# Altium PCB Copy of LoRaStm32.PcbDoc
Units mm, origin at the board's own origin, x right, y up, seen from the top; angles counter-clockwise.
Board outline 80.75 x 33.13 mm, 2 copper layers (Top Layer, Bottom Layer); 29 components, 27 nets, 136 pads, 94 vias.
Unrouted connection lines stored in the file: 30.
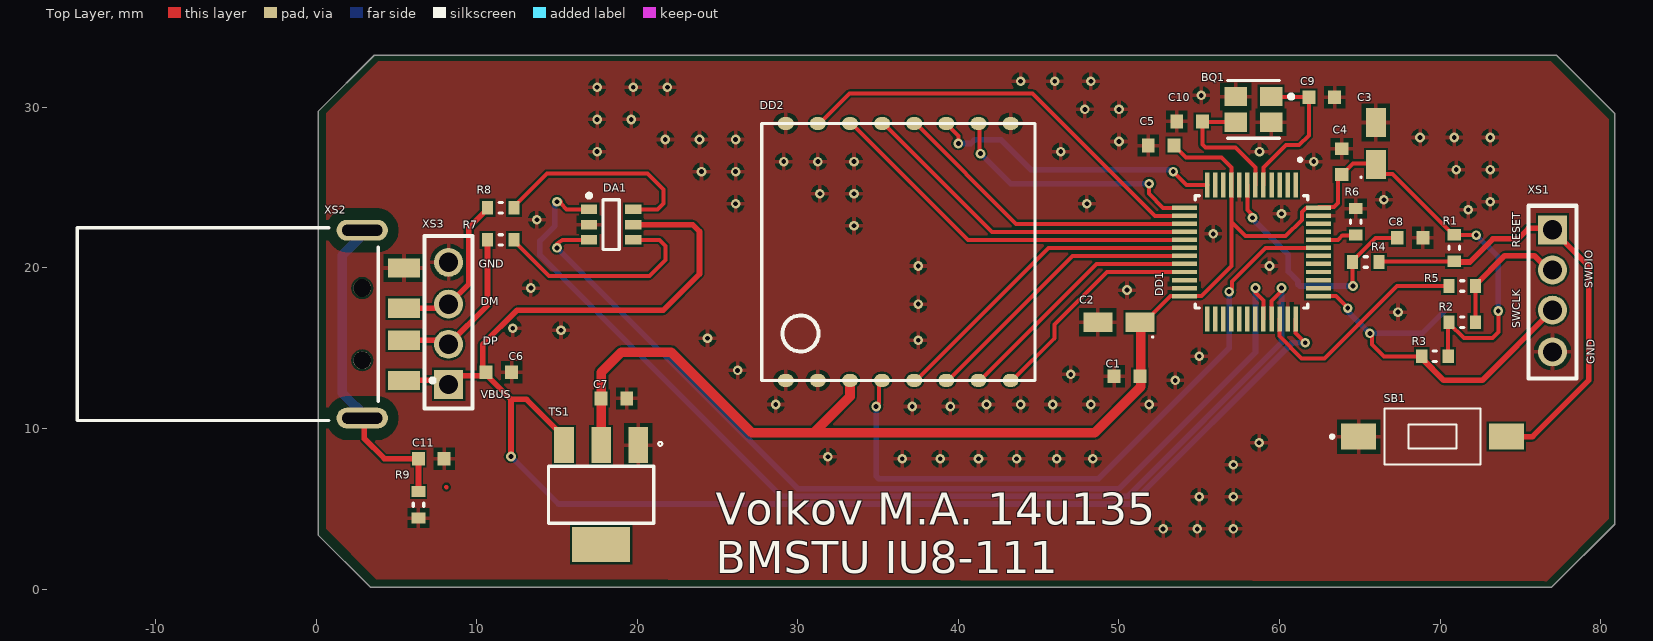
[diagram p0: Top Layer view]
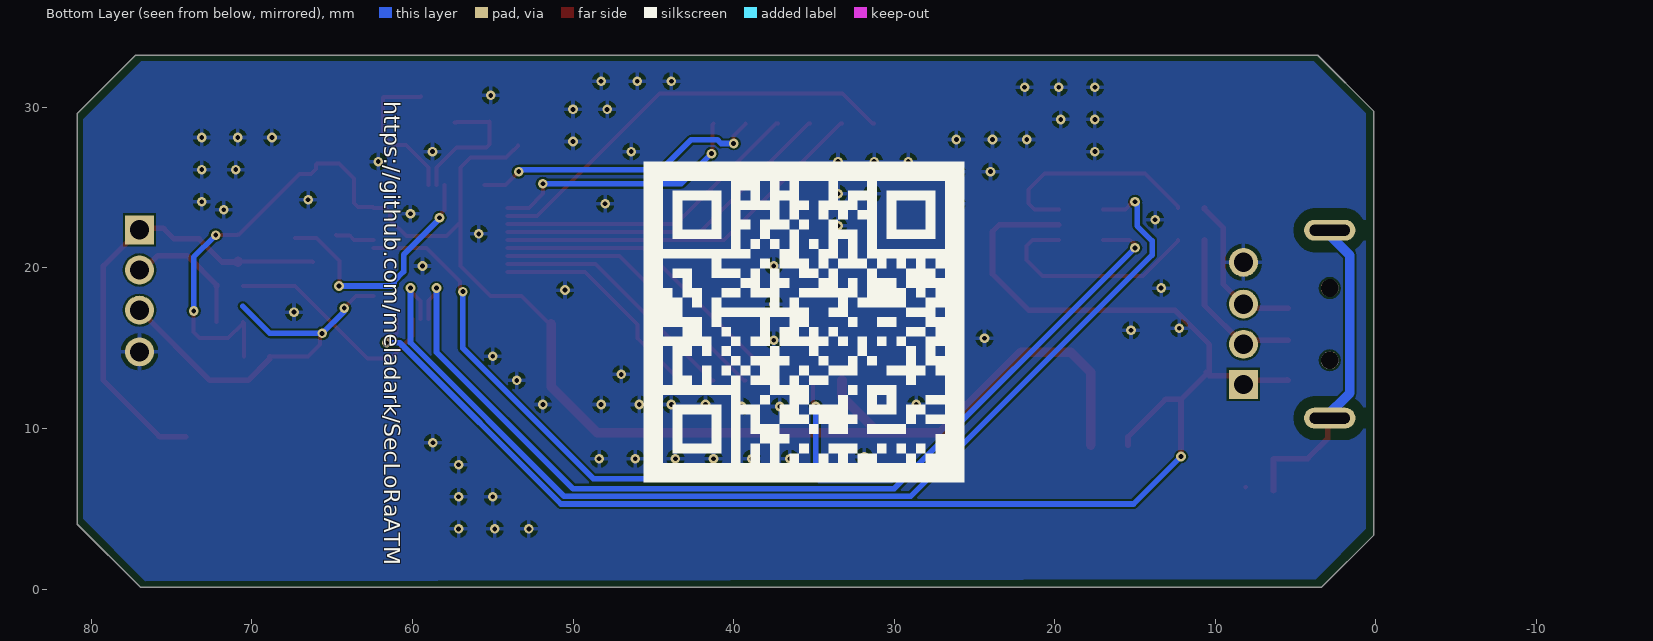
[diagram p1: Bottom Layer view, seen from below]

## Layer stack, top to bottom
Top Solder: solder mask 0.0102, Solder Resist, Dk 3.5
Top Layer: signal copper 0.0356
Dielectric 1: dielectric 0.32, FR-4, Dk 4.8
Bottom Layer: signal copper 0.0356
Bottom Solder: solder mask 0.0102, Solder Resist, Dk 3.5

## Board outline
3.375,0.125 0.125,3.375 0.125,29.75 3.625,33.25 77.25,33.25 80.876,29.624 80.875,4.044 76.956,0.125

## Design rules (kind name [scope] priority, off if disabled: settings)
Clearance [All] p1: gap=0.125 ignorepadtopadclearanceinfootprint=FALSE
PolygonConnect [All] p1: connectstyle=Relief reliefconductorwidth=0.254 reliefentries=4 polygonreliefangle="90 Angle" airgapwidth=0.254
RoutingCorners [All] p1: cornerstyle=45-Degree minsetback=3 maxsetback=3
RoutingVias [All] p1: holewidth=0.3 width=0.7 viastyle="Through Hole" minholewidth=0.3 minwidth=0.6 maxholewidth=0.6 maxwidth=1.2
SolderMaskExpansion [All] p1: expansion=0.102
Width [All] p1: maxlimit=10 minlimit=0.125 preferedwidth=0.6
29 further rules are at their usual default settings.

## Components (designator, comment, footprint, x,y, rotation, side; value= is the part's Value field where it differs from the comment)
BQ1 "NX3225GA" NDK_NX3225GA_0 58.375,29.875 r180 top
C1 "*" CAPC1608X09L 50.5,13.25 r180 top
C2 "*" CAPMP3216X16N-A 50,16.625 r180 top
C3 "*" CAPMP3216X16N-A 66,27.75 r90 top
C4 "GRM188R72A104KA35D" CAPC1608X09L 63.875,26.625 r90 top
C5 "*" CAPC1608X09L 52.625,27.625 r180 top
C6 "*" CAPC1608X09L 11.375,13.5 r0 top
C7 "*" CAPC1608X09L 18.55,11.875 r180 top
C8 "*" CAPC1608X09L 68.125,21.875 r180 top
C9 "*" CAPC1608X09L 62.625,30.625 r180 top
C10 "*" CAPC1608X09L 54.395,29.125 r0 top
C11 "*" CAPC1608X09L 7.175,8.125 r180 top value=4.7n
DA1 "USBLC6-2SC6" SOT95P280X145-6N 18.375,22.7 r0 top
DD1 "STM32L073CZT6" *QFP50P900X900X160-48N 58.25,21 r270 top
DD2 "RA-02 SX1278" RA-02 27.75,13 r90 top
R1 "R1608" RESC1608X05N 70.875,21.25 r270 top value=10k
R2 "R1608" RESC1608X05N 71.375,16.625 r0 top value=10k
R3 "R1608" RESC1608X05N 69.675,14.5 r180 top value=10k
R4 "R1608" RESC1608X05N 65.375,20.375 r0 top value=22
R5 "R1608" RESC1608X05N 71.375,18.875 r0 top value=22
R6 "R1608" RESC1608X05N 64.75,22.875 r270 top value=22
R7 "R1608" RESC1608X05N 11.5,21.75 r180 top value=22
R8 "R1608" RESC1608X05N 11.5,23.75 r180 top value=22
R9 "R1608" RESC1608X05N 6.375,5.25 r90 top value=22
SB1 "1437566-3 (FSMSM)" *SW_1437566-4 69.525,9.5 r0 top
TS1 "LD1117S33CTR" *SOT223 17.75,5.875 r270 top
XS1 "PBS-4" PBS-4 77,22.375 r270 top
XS2 "Conn_Molex_0480372200_eec" Molex_0480372200_0 -5.5,16.5 r270 top
XS3 "PBS-4" PBS-4 8.25,12.75 r90 top

## Footprints (in the part's own frame and the unit in brackets; to place one, negate y for a bottom-side part, rotate by r counter-clockwise, add the part's x,y. Pads: shape width x height; smd on the part's side, far side on the other; paste and mask are expansions set on the pad)
*QFP50P900X900X160-48N [mm]
  rect 1.56x0.28 smd: 1(-4.18,2.75) 2(-4.18,2.25) 3(-4.18,1.75) 4(-4.18,1.25) 5(-4.18,0.75) 6(-4.18,0.25) 7(-4.18,-0.25) 8(-4.18,-0.75) 9(-4.18,-1.25) 10(-4.18,-1.75) 11(-4.18,-2.25) 12(-4.18,-2.75) 25(4.18,-2.75) 26(4.18,-2.25) 27(4.18,-1.75) 28(4.18,-1.25) 29(4.18,-0.75) 30(4.18,-0.25) 31(4.18,0.25) 32(4.18,0.75) 33(4.18,1.25) 34(4.18,1.75) 35(4.18,2.25) 36(4.18,2.75)
  rect 0.28x1.56 smd: 13(-2.75,-4.18) 14(-2.25,-4.18) 15(-1.75,-4.18) 16(-1.25,-4.18) 17(-0.75,-4.18) 18(-0.25,-4.18) 19(0.25,-4.18) 20(0.75,-4.18) 21(1.25,-4.18) 22(1.75,-4.18) 23(2.25,-4.18) 24(2.75,-4.18) 37(2.75,4.18) 38(2.25,4.18) 39(1.75,4.18) 40(1.25,4.18) 41(0.75,4.18) 42(0.25,4.18) 43(-0.25,4.18) 44(-0.75,4.18) 45(-1.25,4.18) 46(-1.75,4.18) 47(-2.25,4.18) 48(-2.75,4.18)
  silkscreen extent -5.84,-3.5 3.5,3.5, body extent -4.5,-4.5 4.5,4.5, height 1.6
*SOT223 [mil]
  rect 88x48 smd: 1(-122,91) 2(-122,0) 3(-122,-91)
  rect 86.61x141.73 smd: 4(122.01,0)
  silkscreen extent -130,-129 70,150, body extent -138,-128 138,128, height 67
*SW_1437566-4 [mm]
  rect 2.18x1.6 smd: 1(-4.6,0) 2(4.6,0)
  silkscreen extent -6.35,-1.75 3,1.75, body extent -4.98,-1.75 4.98,1.75, height 4.4
CAPC1608X09L [mm] "Chip Capacitor, 2-Leads, Body 1.60x0.80mm, IPC High Density"
  rect 0.8x0.85 smd paste-0.05 mask+0.07: 1(-0.8,0) 2(0.8,0)
  body extent -0.8,-0.4 0.8,0.4, height 0.9
CAPMP3216X16N-A [mm] "Molded Capacitor, 2-Leads, Body 3.20x1.60mm, IPC Medium Density"
  rect 1.8x1.23 smd: 1(-1.31,0) 2(1.31,0)
  silkscreen extent -2.15,0.88 -2.05,0.97, body extent -1.92,-0.9 1.92,0.9, height 1.6
Molex_0480372200_0 [mm]
  rect 1.2x2 smd paste+0 mask+0: 1(3.5,10.975) 2(1,10.975) 3(-1,10.975) 4(-3.5,10.975)
  oval 1.3x3.2 hole 2.5 slot 0.7 at 0 deg paste-1000 mask+0: 5(-5.85,8.375) 6(5.85,8.375)
  round 1.1 hole 1.1 unplated paste-1000 mask+0: ""(-2.25,8.375) ""(2.25,8.375)
  silkscreen extent -6,-9.38 6,12.88, body extent -6.02,-9.32 6.03,11.63, height 2.11
NDK_NX3225GA_0 [mm]
  rect 1.4x1.2 smd paste+0 mask+0: 1(-1.1,-0.8) 2(1.1,-0.8) 3(1.1,0.8) 4(-1.1,0.8)
  silkscreen extent -2.48,-1.8 1.6,1.8, body extent -1.6,-1.25 1.6,1.25, height 0.6
PBS-4 [mm]
  rect 1.8x1.8 hole 1.2: 1(0,0)
  round 1.8 hole 1.2: 2(2.5,0) 3(5,0) 4(7.6,0)
  silkscreen extent -1.5,-1.5 9.25,1.5, body extent -1.25,-1.27 8.91,1.27, height 8.6
RA-02 [mm]
  oval 0.8x1 smd: 1(0,-1.5) 2(0,-3.5) 3(0,-5.5) 4(0,-7.493) 5(0,-9.5) 6(0,-11.5) 7(0,-13.5) 8(0,-15.5) 9(16,-15.5) 10(16,-13.5) 11(16,-11.5) 12(16,-9.5) 13(16,-7.5) 14(16,-5.5) 15(16,-3.5) 16(16,-1.5)
  silkscreen extent 0,-17.02 16,0, body extent 0,-17.01 16,-0.01, height 3.2
RESC1608X05N [mm] "Chip Resistor, 2-Leads, Body 1.60x0.80mm, IPC Medium Density"
  rect 0.7x0.85 smd paste-0.05: 1(-0.825,0) 2(0.825,0)
  silkscreen extent -0.1,-0.33 0.1,0.33, body extent -0.8,-0.4 0.8,0.4, height 0.45
SOT95P280X145-6N [mm] "SOT23, 6-Leads, Body 2.92x2.80mm, Pitch 0.95mm, IPC Medium Density"
  rect 1x0.6 smd: 1(-1.375,0.95) 2(-1.375,0) 3(-1.375,-0.95) 4(1.375,-0.95) 5(1.375,0) 6(1.375,0.95)
  silkscreen extent -1.5,-1.55 0.5,1.92, body extent -1.6,-1.53 1.6,1.53, height 1.45

## Part data
BQ1: library part NX3225GA-25MHZ, "NX3225GA-25MHZ 8pF, 25 МГц, 30/20ppm, 8пФ, -40...+85°C, SMD 3.2*2.5*0.75мм, Кварцевый резонатор", Package="SMD-4 NDK America, Inc.", Availability=Unavailable, ComponentLink1Description=buy, ComponentLink1URL=https://www.chipdip.ru/product0/9000523947, ComponentLink2Description=datasheet, ComponentLink2URL=https://static.chipdip.ru/lib/014/DOC004014815.pdf, MF="NDK America, Inc.", MP="NX3225GA-25MHZ 8pF", Price=None, SnapEDA_Link=https://www.snapeda.com/parts/NX2520SA-24.000000MHZ-B8/NDK%20America%2C%20Inc./view-part/?ref=snap
C1 C4 C5 C6 C7 C8 C9 C10 C11: library part CC1608, "Конденсатор 1.6x0.8 мм", Tolerance=±10%, ТКЕ=X7R
  C1 C4 C5 C8: GRM188R71H104K=100nF, РКД Наименование="CC1608M - NP0 - 16 V - 10 nF ±10%"
  C6: GRM188R71H104K=100n, РКД Наименование="CC1608M - NP0 - 16 V - 10 nF ±10%"
  C7: GRM188R61E106M=10u, РКД Наименование="CC1608M - NP0 - 16 V - 10 nF ±10%"
  C9: GRM1885C1H240J=24pF, РКД Наименование="CC1608M - NP0 - 16 V - 10 nF ±10%"
  C10: GRM1887U1H472JA01D=24pF, РКД Наименование="CC1608M - NP0 - 16 V - 10 nF ±10%"
  C11: РКД Наименование="CC1608M - NP0 - 16 V - 4.7 nF ±10%"
C2 C3: library part CT3216-A, "Tantalum Surface Mount Capacitor, Size A", Voltage=6.3V
  C2: TECAP1/16VA10=1uF
  C3: TECAP10/10VA10=10uF
DA1: "USB protection IC", Breakdown Voltage=6V, Capacitance=3.5pF, Case/Package=SOT-23, Clamping Voltage=17V, Leakage Current=150nA, Manufacturer=STMicroelectronics, Max Operating Temperature=125°C, Min Operating Temperature=-40°C, Operating Supply Voltage=1.1V, Package Quantity=3000, Peak Pulse Current=5A, Power Line Protection=Yes, Reverse Standoff Voltage=5.25V, Supplier Part Number 1=497-5235-1-ND, Test Current=1mA, Working Voltage=5V, ComponentLink1Description=http://www.farnell.com/datasheets/1690354.pdf, ComponentLink1URL=http://www.farnell.com/datasheets/1690354.pdf, ComponentLink2Description=http://www.st.com/content/ccc/resource/technical/document/datasheet/06/1d/48/9c/6c/20/4a/b2/CD00050750.pdf/files/CD00050750.pdf/jcr:content/translations/en.CD00050750.pdf, ComponentLink2URL=http://www.st.com/content/ccc/resource/technical/document/datasheet/06/1d/48/9c/6c/20/4a/b2/CD00050750.pdf/files/CD00050750.pdf/jcr:content/translations/en.CD00050750.pdf, ComponentLink3Description=http://www.st.com/web/en/resource/technical/document/datasheet/CD00050750.pdf, ComponentLink3URL=http://www.st.com/web/en/resource/technical/document/datasheet/CD00050750.pdf, ComponentLink4Description=http://datasheet.iiic.cc/stmicroelectronics/USBLC6-2SC6.pdf, ComponentLink4URL=http://datasheet.iiic.cc/stmicroelectronics/USBLC6-2SC6.pdf, ComponentLink5Description=http://www.produktinfo.conrad.com/datenblaetter/1100000-1199999/001184109-da-01-en-IC_ESD_PROTECTI_USBLC6_2SC6_SOT_23_6_STM.pdf, ComponentLink5URL=http://www.produktinfo.conrad.com/datenblaetter/1100000-1199999/001184109-da-01-en-IC_ESD_PROTECTI_USBLC6_2SC6_SOT_23_6_STM.pdf, Contact Plating=Matte,Tin, Data Rate=480Mbps, Depth=1.75mm, Direction=Bidirectional,Unidirectional, Element Configuration=Dual, ESD Protection=Yes, Height=1.3mm, Lead Free="Lead Free", Length=3.05mm, Manufacturer Part Number=USBLC6-2SC6, Max Breakdown Voltage=6V, Max Reverse Leakage Current=150nA, Min Breakdown Voltage=6V, Mount="Surface Mount", Number of Bidirectional Channels=2, Number of Channels=2, Number of Elements=1, Number of Pins=6, Packaging="Tape and Reel", PartNo=USBLC6-2SC6, Polarity=Bidirectional,Unidirectional, Pricing 1="1=0.49, 10=0.419, 100=0.3131, 500=0.24602, 1000=0.1901 (USD)", Radiation Hardening=No, REACH SVHC="No SVHC", Reverse Breakdown Voltage=6V, Stock 1=165611, Supplier 1=Digi-Key, Termination=SMD/SMT, Width=1.75mm
DD1: "ARM® Cortex®-M0+ STM32 L0 Microcontroller IC 32-Bit 32MHz 192KB _192K x 8_ FLASH 48-LQFP", Package="LQFP-48 STMicroelectronics", Digi-Key_Part_Number=497-17506-ND, Digi-Key_Purchase_URL=https://www.digikey.com/product-detail/en/stmicroelectronics/STM32L073CZT6/497-17506-ND/8024098?utm_source=snapeda&utm_medium=aggregator&utm_campaign=symbol, MF=STMicroelectronics, MP=STM32L073CZT6, SnapEDA_Link=https://www.snapeda.com/parts/STM32L073CZT6/STMicroelectronics/view-part/?ref=snap
DD2: library part RA-02
R1 R2 R3 R4 R5 R6 R7 R8 R9: "Резистор 1.6x0.8 мм", Tolerance=±1%, РКД Наименование="RC1608M - 22 Ohm ±1%"
SB1: library part FSMSM, "1437566-3 (FSMSM), Кнопка тактовая h=4.6 мм SMD SPST Switch Tactile / Switch Tactile OFF (ON) SPST Rectangular Button Gull Wing 0.05A 24VDC SMD Loose", ComponentLink1Description=buy, ComponentLink1URL=https://www.chipdip.ru/product/tyco-1437566-3-fsmsm, ComponentLink2Description=datasheet, ComponentLink2URL=https://static.chipdip.ru/lib/071/DOC000071159.pdf, Артикул="1437566-3 (FSMSM)", Произвдитель="TE Connectivity"
TS1: "Linear Regulator / LDO Regulator Pos 3.3V 1.3A 4-Pin(3+Tab) SOT-223 T/R", Code_IPC=SOT-223, ComponentLink1Description=buy, ComponentLink1URL=https://www.chipdip.ru/product/ld1117s33ctr-2, ComponentLink2Description=datasheet, ComponentLink2URL=https://static.chipdip.ru/lib/292/DOC000292513.pdf, DatasheetVersion="revB, Feb-2007", PackageDescription="3-Lead Plastic Small Outline Transistor (TT) [SOT-23]", PackageReference=SOT-223, PackageVersion="revBB, Aug-2009", PartNumber=LD1117S33CTR
XS1: library part "отладка swd", "2.54mm swdio", ComponentLink1Description=3d, ComponentLink1URL=https://www.3dcontentcentral.com/secure/download-model.aspx?catalogid=171&id=455493, ComponentLink2Description=https://www.chipdip.ru/product/pld-6, ComponentLink2URL=https://www.chipdip.ru/product/pld-6
XS2: "CONN PLUG USB A 4POS SMD R/A", Current - Maximum per Contact=1.5A, Digikey Part Number=WM3983CT-ND, Manufacturer=Molex, Mouser Part Number=538-48037-2200, Package=CONN_USB_12MM0_18MM75, Part Number=0480372200, Temperature="-20°C to +85°C", Temperature Range High=+85°C, Temperature Range Low=-20°C, Voltage - Maximum="150V AC (RMS)", ComponentLink1Description=Upverter, ComponentLink1URL=https://upverter.com/upn/revision/6bade1e906f93a88/, ComponentLink2Description=Datasheet, ComponentLink2URL=http://www.molex.com/pdm_docs/sd/480372200_sd.pdf, Digikey Description="CONN PLUG USB A 4POS SMD R/A", helpURL=https://upverter.com/upn/revision/6bade1e906f93a88/, Is Female=yes, Lead Free=yes, Price=0.972849437621, RoHS=TRUE, Supplier 1=Digi-Key, Supplier 2=Mouser, Supplier Part Number 1=WM3983CT-ND, Supplier Part Number 2=538-48037-2200
XS3: "2.54mm", ComponentLink1Description=3d, ComponentLink1URL=https://www.3dcontentcentral.com/secure/download-model.aspx?catalogid=171&id=455493, ComponentLink2Description=https://www.chipdip.ru/product/pld-6, ComponentLink2URL=https://www.chipdip.ru/product/pld-6

## Via types
v1: diameter 0.6, hole 0.3, Top Layer to Bottom Layer, 94 vias

## Nets (pads, with @x,y where several pads share a name; then routed paths per layer and width w, separated by ;. In a path a pad name is that pad's centre, name@x,y a point inside that pad or via, vN(x,y) a via of type N, cw(c..) or ccw(c..) an arc to the next point about the centre after c; other vN are vias at no path point)
D+: DA1.1 DD1.33 R7.2 XS2.2 XS3.2 | length 78.1
  Top Layer w0.25: v1@15.25,24.125 15.25,24.001 15.601,23.65 DA1.1 ; DD1.33 59.5,17.933 60.125,18.558 v1(60.125,18.75)
  Top Layer w0.35: XS2.2 8,15.5 XS3.2 10.675,17.675 R7.2
  Bottom Layer w0.35: v1(15,24.125) 14.872,23.997 14.872,22.621 13.94,21.689 13.94,20.811 28.976,5.775 50.55,5.775 60.125,15.35 v1(60.125,18.75)
D-: DA1.3 DD1.32 R8.2 XS2.3 XS3.3 | length 71.6
  Top Layer w0.25: v1(15,21.25) 15,21.5 15.375,21.75 DA1.3 ; v1(58.5,18.75) 58.5,18.482 59,17.982 DD1.32
  Top Layer w0.35: XS2.3 8,17.5 XS3.3 9.514,19.014 9.514,22.514 10.675,23.675 R8.2
  Bottom Layer w0.35: v1(15,21.25) 30,6.25 50,6.25 58.5,14.75 v1(58.5,18.75)
GND: BQ1.2 BQ1.4 C1.2 C2.2 C3.2 C4.2 C5.2 C6.2 C7.1 C8.1 C9.1 C10.1 C11.1 DA1.2 DD1.8 DD1.23 DD1.35 DD1.47 DD2.1 DD2.2 DD2.9 DD2.16 R6.1 R9.1 SB1.1 TS1.1 XS1.4 XS2.4 XS3.4
  other v1: 52.75,3.75 54.875,3.75 57.125,3.75 55,5.75 57.125,5.75 57.125,7.75 36.5,8.125 38.875,8.125 41.25,8.125 43.625,8.125 46.125,8.125 48.375,8.125 31.875,8.25 58.728,9.118 37.125,11.375 39.5,11.375 28.625,11.5 41.75,11.5 43.875,11.5 45.875,11.5 48.25,11.5 51.875,11.5 53.5,13 47,13.375 26.25,13.625 55,14.5 37.5,15.5 24.375,15.625 15.25,16.125 12.25,16.25 67.375,17.25 37.5,17.75 50.5,18.625 13.375,18.75 37.5,20.125 59.375,20.125 55.875,22.125 33.5,22.625 13.75,23.001 60.125,23.375 71.75,23.625 26.125,24 48,24 73.125,24.125 66.5,24.25 31.375,24.625 33.5,24.625 24,26 26.125,26 71,26.125 73.125,26.125 29.125,26.625 31.25,26.625 33.5,26.625 62.125,26.625 17.5,27.25 46.375,27.25 58.75,27.25 50,27.875 21.75,28 23.875,28 26.125,28 68.75,28.125 70.875,28.125 73.125,28.125 17.5,29.25 19.625,29.25 47.875,29.875 50,29.875 55.125,30.75 17.5,31.25 19.75,31.25 21.875,31.25 43.875,31.625 46,31.625 48.25,31.625
MISO: DD1.16 DD2.13 | length 21.6
  Top Layer w0.25: DD2.13 35.35,29 42.1,22.25 DD1.16
MOSI: DD1.17 DD2.14 | length 23.8
  Top Layer w0.25: DD2.14 33.35,29 40.6,21.75 DD1.17
NetBQ1_1: BQ1.1 C9.2 DD1.5 | length 9.5
  Top Layer w0.25: DD1.5 59,26.25 60.4,27.65 61.225,27.65 61.825,28.25 C9.2 61.8,30.65 59.5,30.65 BQ1.1
NetBQ1_3: BQ1.3 C10.2 DD1.6 | length 8.6
  Top Layer w0.25: BQ1.3@57.375,29.075 BQ1.3 57.25,29.1 55.22,29.1 C10.2 55.195,27.68 55.375,27.5 57.25,27.5 58.5,26.25 DD1.6
NetC8_2: C8.2 DD1.7 R4.1 | length 15.6
  Top Layer w0.25: DD1.7 58,23.624 58.312,23.311 v1(58.312,23.125) ; v1@64.55,19.15 R4.1 64.55,20.45 65.975,21.875 C8.2
  Bottom Layer w0.35: v1(58.312,23.125) 58.312,23.062 60.55,20.825 60.55,19.775 61.15,19.175 61.15,18.975 61.25,18.875 v1(64.575,18.875)
NetC11_2: C11.2 R9.2 XS2.5 XS2.6 | length 20.9
  Top Layer w0.25: 8.125,6.325 8.1,6.35 8.125,6.375
  Top Layer w0.35: XS2.6 3,10.525 3,9.375 4.25,8.125 C11.2 R9.2@6.375,6.125
  Bottom Layer w0.25: XS2.6 XS2.6@3.19,10.65 ; XS2.5 XS2.5@3.19,22.35
  Bottom Layer w0.6: XS2.6@3.19,10.65 1.625,12.215 1.625,20.785 XS2.5@3.19,22.35
NetDD1_18: DD1.18 DD2.5 | length 20.2
  Top Layer w0.25: DD2.5 37.35,13 45.6,21.25 DD1.18
NetDD1_19: DD1.19 DD2.6 | length 18
  Top Layer w0.25: DD2.6 39.35,13 47.1,20.75 DD1.19
NetDD1_20: DD1.20 DD2.7 | length 15.8
  Top Layer w0.25: DD2.7 41.35,13 48.6,20.25 DD1.20
NetDD1_21: DD1.21 DD2.8 | length 14.1
  Top Layer w0.25: DD2.8 43.35,13 45.975,15.625 45.975,16.475 49.25,19.75 DD1.21
NetDD1_34: DD1.34 R5.1 | length 14.1
  Top Layer w0.25: DD1.34 60,15.75 61.375,14.375 62.8,14.375 67.3,18.875 R5.1
NetDD1_43: DD1.43 DD2.4 | length 42
  Top Layer w0.25: v1(34.875,11.375) 35.051,11.551 35.051,12.808 DD2.4 ; v1(56.86,18.527) 57.036,18.703 57.036,19.161 59.125,21.25 DD1.43
  Bottom Layer w0.35: v1(34.875,11.375) 34.875,7.039 35.039,6.875 48.735,6.875 56.86,15 v1(56.86,18.527)
NetDD1_44: DD1.44 R6.2 | length 2.4
  Top Layer w0.25: DD1.44 63.625,21.75 63.905,22.03 64.73,22.03 R6.2
NSS: DD1.14 DD2.15 | length 26.8
  Top Layer w0.25: DD2.15 31.35,29 33.225,30.875 44.625,30.875 52.25,23.25 DD1.14
PA2: DD1.12 DD2.11 | length 18.3
  Top Layer w0.25: DD2.11 39.25,28.959 40,28.209 v1(40,27.75) ; v1(53.375,26) 54.195,25.18 DD1.12
  Bottom Layer w0.35: v1(40,27.75) 40.777,27.75 41.017,27.99 42.635,27.99 44.51,26.115 53.26,26.115 v1(53.375,26)
PA3: DD1.13 DD2.10 | length 16.4
  Top Layer w0.25: DD2.10 41.313,28.937 41.313,27.187 v1(41.375,27.125) ; v1(51.875,25.25) 51.875,24.625 52.75,23.75 DD1.13
  Bottom Layer w0.35: v1(41.375,27.125) 43.25,25.25 v1(51.875,25.25)
RESET: R1.2 R4.2 SB1.2 XS1.1 | length 28.6
  Top Layer w0.25: R4.2 66.225,20.4 R1.2@70.85,20.4
  Top Layer w0.35: R1.2 70.925,20.375 71.85,20.375 73.285,21.81 74.841,21.81 75.5,22.468 76.906,22.468 XS1.1 79.25,20.125 79.25,13 75.75,9.5 SB1.2
  Top Layer w0.6: R1.2@70.85,20.4 R1.2@70.875,20.375
SCK: DD1.15 DD2.12 | length 19.4
  Top Layer w0.25: DD2.12 37.35,29 43.6,22.75 DD1.15
SWCLK: DD1.37 R3.2 XS1.3 | length 24.7
  Top Layer w0.25: DD1.37 63.501,18.25 v1(64.251,17.5) ; v1(65.625,15.925) 65.75,15.8 65.75,15.25 66.5,14.5 R3.2
  Top Layer w0.28: R3.2 R3.2@68.884,14.466
  Top Layer w0.35: R3.2@68.884,14.466 68.884,14.345 70.229,13 72.625,13 XS1.3
  Bottom Layer w0.35: v1(64.251,17.5) 64.251,17.299 v1(65.625,15.925) 68.875,15.925 70.575,17.625
SWDIO: R2.2 R5.2 XS1.2 | length 8.2
  Top Layer w0.25: R2.2 R5.2
  Top Layer w0.35: R5.2 72.2,18.95 74.01,20.76 75.87,20.76 76.755,19.875 XS1.2
USB1_N: DA1.4 R7.1 | length 13.7
  Top Layer w0.25: R7.1 12.325,21.675 R7.1@12.375,21.625 ; R7.1@12.45,21.55 14.5,19.5 20.75,19.5 21.75,20.5 21.75,21.374 21.374,21.75 DA1.4
USB1_P: DA1.6 R8.1 | length 13.5
  Top Layer w0.25: R8.1 12.325,23.825 14.375,25.875 20.625,25.875 21.625,24.875 21.625,24.001 21.274,23.65 DA1.6
V3.3: C1.1 C2.1 C3.1 C4.1 C5.1 C7.2 DD1.9 DD1.24 DD1.48 DD2.3 R1.1 R2.1 R3.1 TS1.2 | length 100.6
  Top Layer w0.25: C2.1 C2.1@51.452,16.625 ; C2.1@51.346,16.518 C2.1@51.452,16.625 ; C5.1 53.425,27.6 53.685,27.34 53.71,27.34 54.175,26.875 56.375,26.875 57,26.25 DD1.9 57,22.875 ; 61.385,23 60.385,22 57.875,22 57,22.875 ; 61.385,23 61.385,23.5 61.635,23.75 DD1.48 62.47,23.79 63.382,23.79 63.625,24.033 63.625,25.575 C4.1 63.9,25.825 64.582,26.507 65.933,26.507 C3.1 66,26.155 66.315,25.84 67.035,25.84 70.8,22.075 R1.1 70.9,22.05 v1(72.25,22.05) ; R3.1 R2.1@70.5,16.575 ; R2.1 70.55,16.55 71.475,15.625 73.25,15.625 73.625,16 v1(73.625,17.325) ; C2.1@51.452,16.625 51.595,16.625 53.22,18.25 DD1.24 55.125,18.25 57,20.125 57,22.875
  Top Layer w0.6: TS1.2 C7.2 17.75,13.5 19,14.75 22.125,14.75 27.125,9.75 31,9.75 ; DD2.3 33.25,12 31,9.75 ; C2.1@51.346,16.518 51.346,12.596 48.5,9.75 31,9.75
  Bottom Layer w0.35: v1@72.25,22 72.3,22 73.625,20.675 v1(73.625,17.325)
VBUS: C6.1 DA1.5 DD1.36 TS1.3 XS2.1 XS3.1 | length 96.9
  Top Layer w0.25: v1@12.125,8.25 v1(12.135,8.26) ; DD1.36 61,15.942 v1(61.596,15.346)
  Top Layer w0.35: XS2.1@5.525,13.05 XS2.1 8,13 XS3.1 8.8,13.3 10.375,13.3 10.375,15.224 12.526,17.375 21.625,17.375 23.875,19.625 23.875,22.274 23.449,22.7 DA1.5 ; C6.1@10.45,13.375 C6.1@10.513,13.437 ; C6.1 C6.1@10.513,13.437 ; v1(12.135,8.26) 12.135,11.815 ; TS1.3 15.439,9.482 13.106,11.815 12.135,11.815 ; C6.1@10.513,13.437 12.135,11.815
  Bottom Layer w0.35: v1(12.135,8.26) 15.095,5.3 50.747,5.3 60.793,15.346 v1(61.596,15.346)
pads on no net: DD1.1 DD1.2 DD1.3 DD1.4 DD1.10 DD1.11 DD1.22 DD1.25 DD1.26 DD1.27 DD1.28 DD1.29 DD1.30 DD1.31 DD1.38 DD1.39 DD1.40 DD1.41 DD1.42 DD1.45 DD1.46 TS1.4 XS2.

## Polygon pours and split planes (outlines as drawn)
GND on Top Layer "GND" (solid, pour order 40): 3.75,0.625 0.625,3.75 0.625,29.625 3.875,32.875 76.875,32.875 80.5,29.25 80.5,4.375 76.625,0.5 76.5,0.5
GND on Top Layer "Top Layer-GND 1" (solid, pour order 2): 65.25,6.25
GND on Bottom Layer "GND" (solid, pour order 46): 83.125,7.5
GND on Bottom Layer "GND" (solid, pour order 44): 3.75,0.625 0.625,3.75 0.625,29.625 3.875,32.875 76.875,32.875 80.5,29.25 80.5,4.375 76.625,0.5
GND on Bottom Layer "GND" (solid, pour order 20): 3.375,0.75
GND on Bottom Layer "Bottom Layer-GND 1" (solid, pour order 6): 1,1.125

## Silkscreen, mask and mechanical layers (free items; w line width, h text height)
Top Overlay:
  text "RESET" at 75,21.25 h0.5 r90
  text "GND" at 10.125,20 h0.5
  text "SWDIO" at 79.5,18.75 h0.5 r90
  text "DM" at 10.25,17.675 h0.5
  text "SWCLK" at 75,16.25 h0.5 r90
  text "DP" at 10.375,15.224 h0.5
  text "GND" at 79.625,14 h0.5 r90
  text "VBUS" at 10.25,11.875 h0.5
  text "Volkov M.A. 14u135 / BMSTU IU8-111" at 24.875,1 h2
Bottom Overlay:
  drawing of 255 lines, arcs and shapes, not listed
  text "https://github.com/meladark/SecLoRaATM" at 61.75,30.375 h1 r90
Mechanical 13:
  the board outline again, w0.25